# Altium PCB smart_bms.PcbDoc
Units mm, origin at the board's own origin, x right, y up, seen from the top; angles counter-clockwise.
Board outline 50 x 50 mm, 2 copper layers (Top Layer, Bottom Layer); 164 components, 149 nets, 655 pads, 9 vias.
Unrouted connection lines stored in the file: 476.
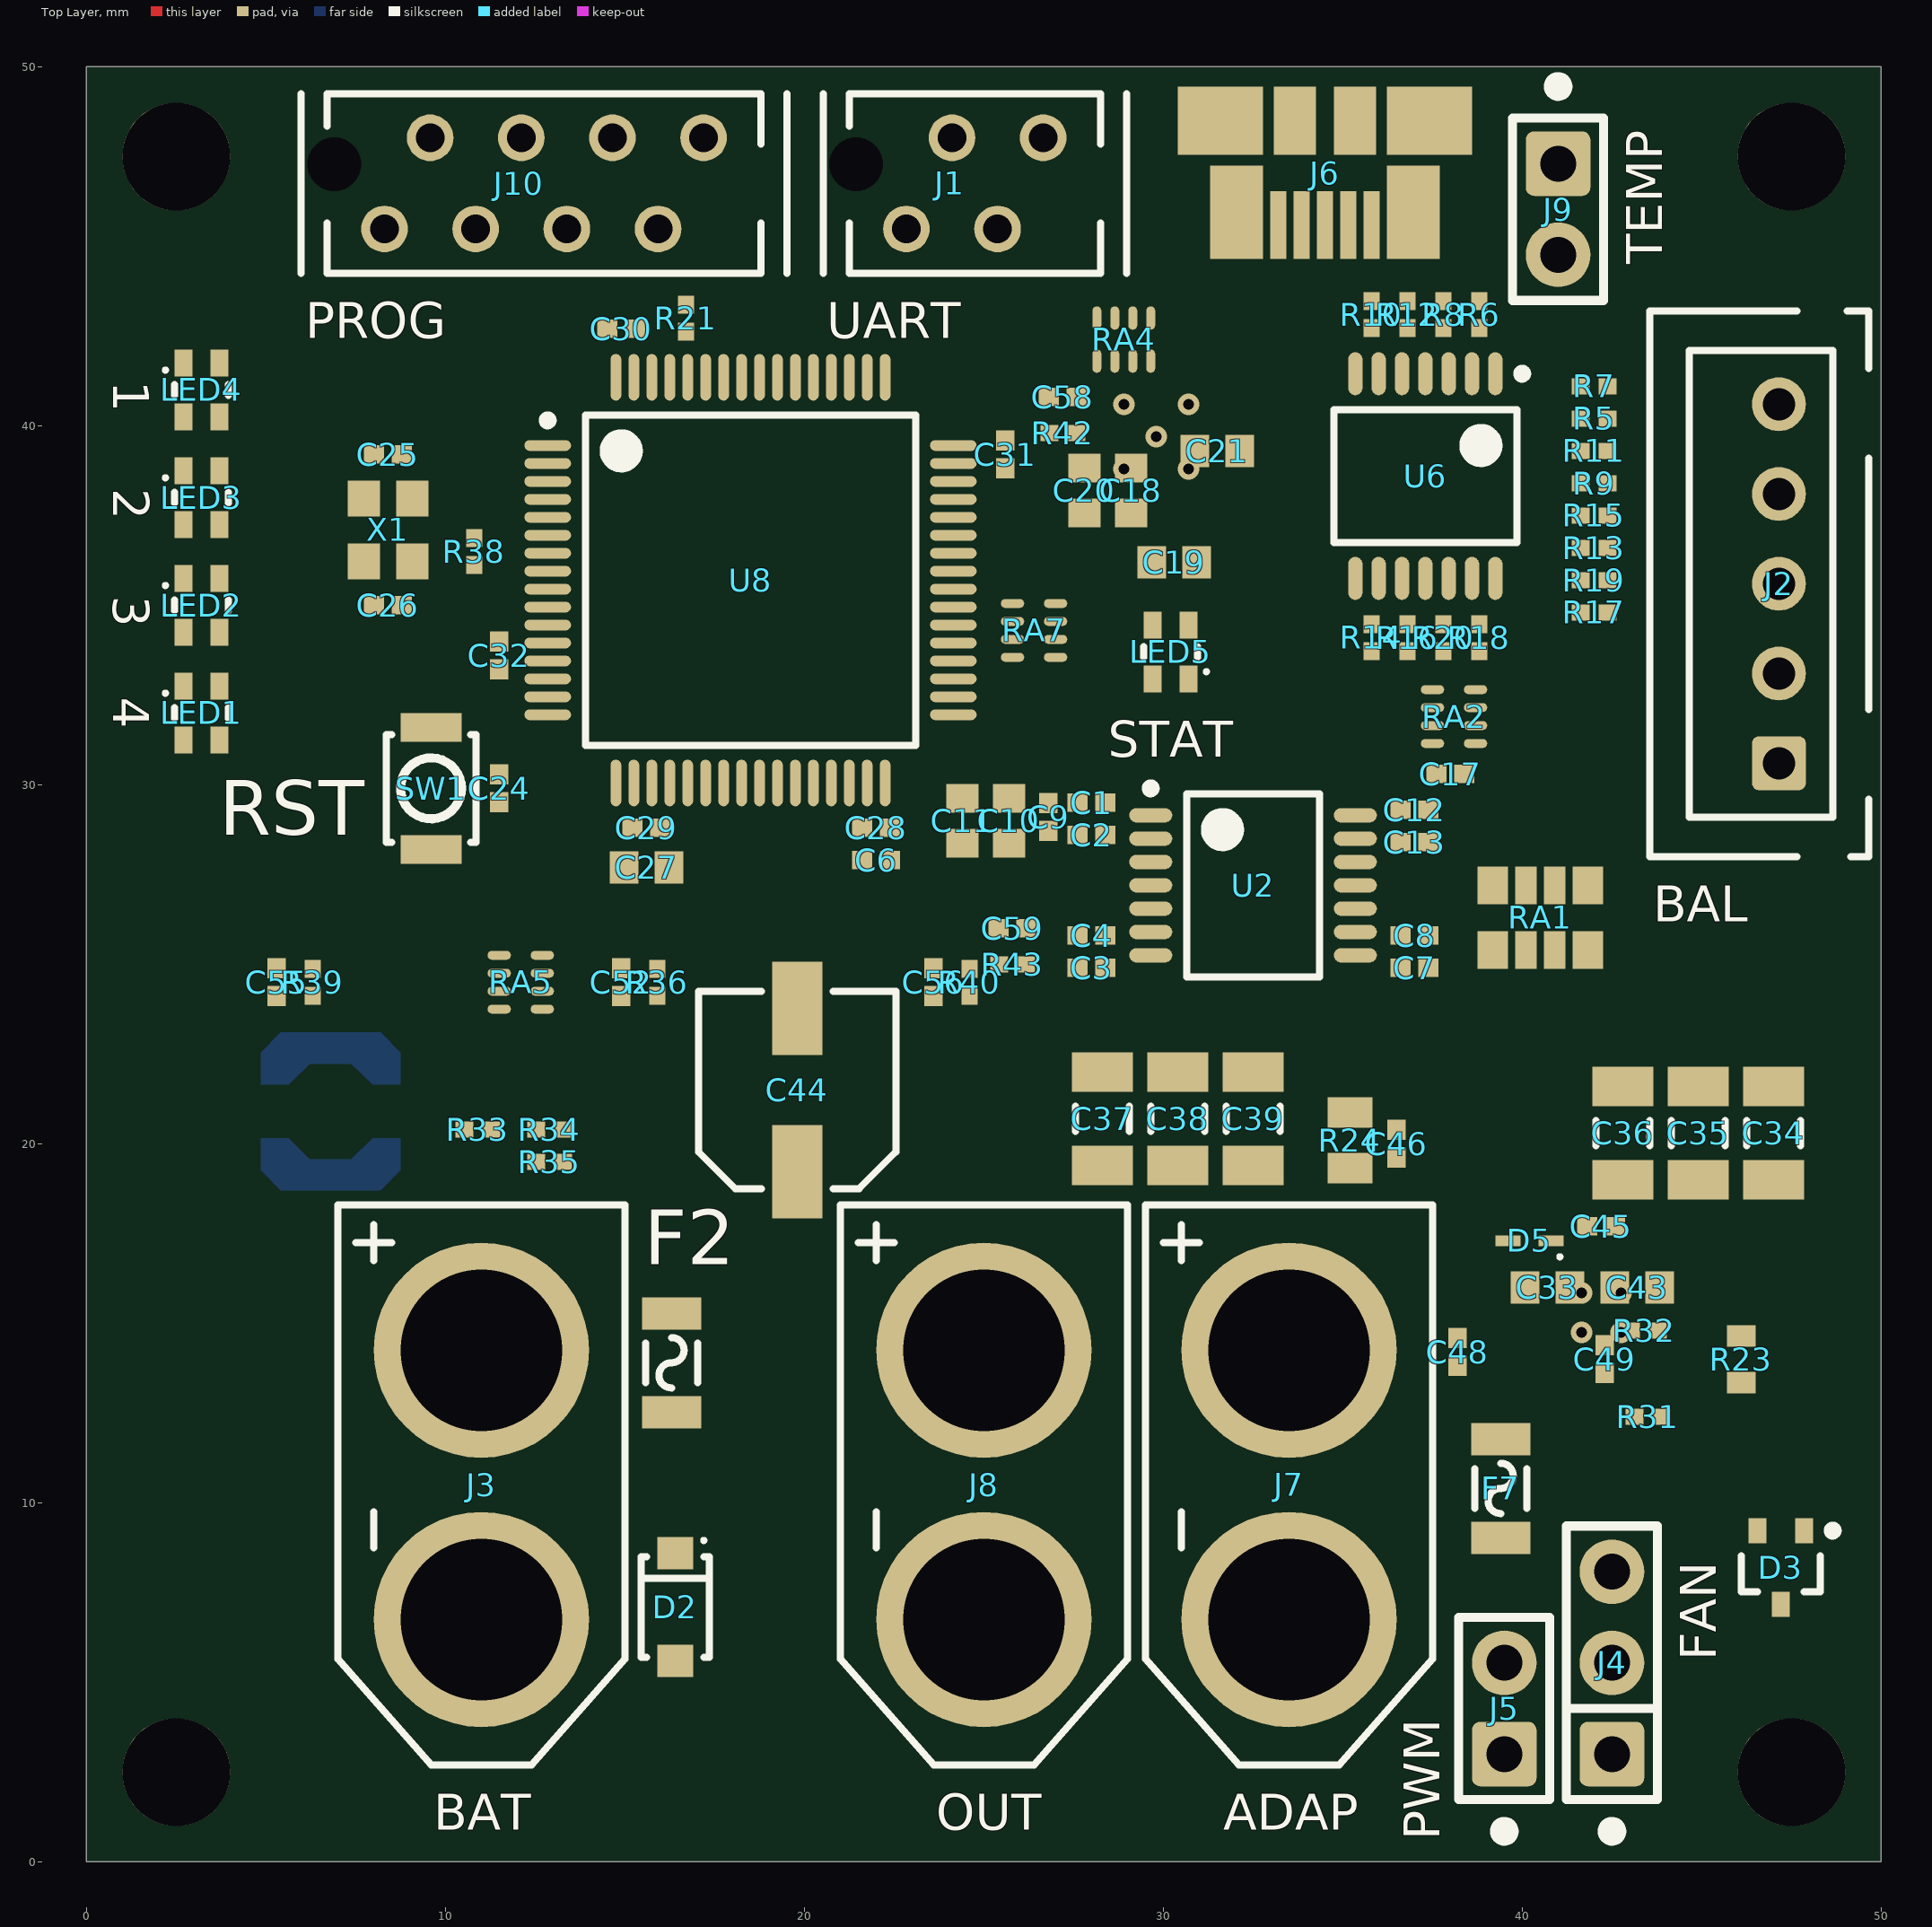
[diagram p0: Top Layer view]
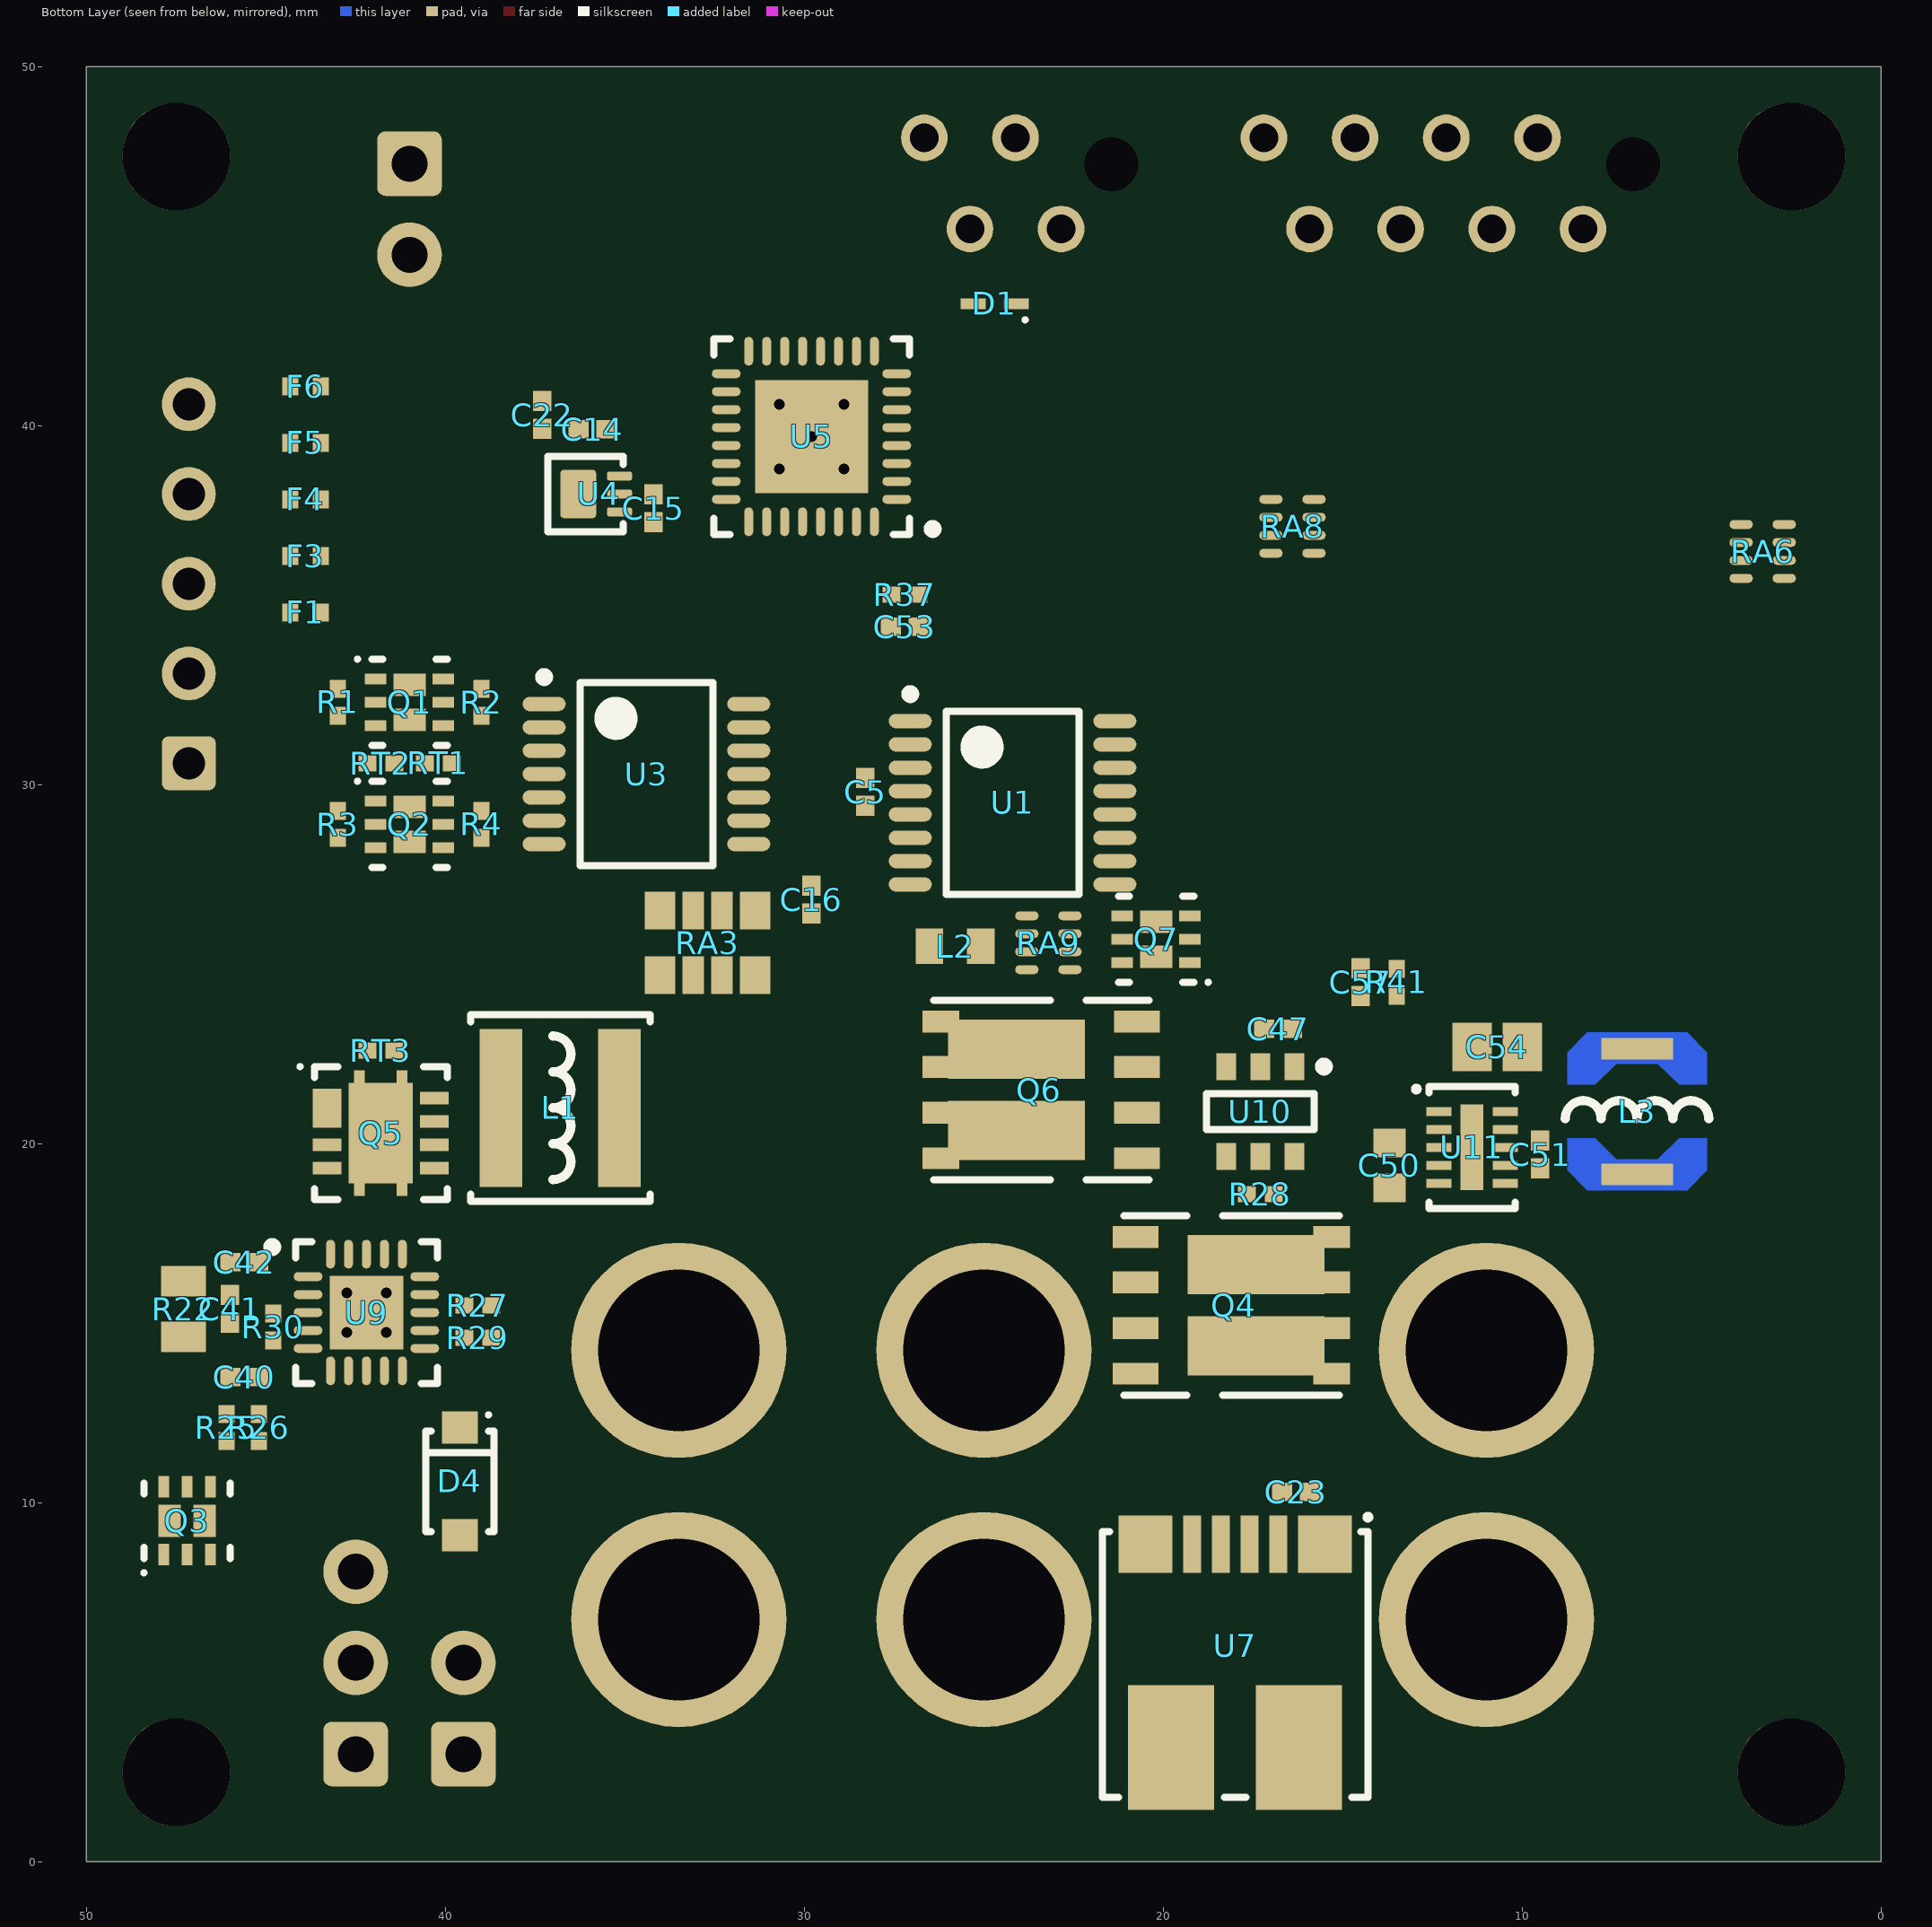
[diagram p1: Bottom Layer view, seen from below]

## Layer stack, top to bottom
Top Solder: solder mask 0.0102, Solder Resist, Dk 3.5
Top Layer: signal copper 0.0356
Dielectric 1: dielectric 0.32, FR-4, Dk 4.8
Bottom Layer: signal copper 0.0356
Bottom Solder: solder mask 0.0102, Solder Resist, Dk 3.5

## Board outline
0,0 50,0 50,50 0,50

## Design rules (kind name [scope] priority, off if disabled: settings)
Clearance [All] p1: gap=0.15 ignorepadtopadclearanceinfootprint=FALSE
DiffPairsRouting [All] p1: maxlimit=0.3 minlimit=0.15 mostfreqgap=0.2 toplayer_minwidth=0.15 toplayer_maxwidth=0.4 toplayer_prefwidth=0.2 bottomlayer_minwidth=0.15 bottomlayer_maxwidth=0.4 bottomlayer_prefwidth=0.2 maxuncoupledlength=12.7
HoleSize [All] p1: absolutevalues=TRUE maxlimit=6.3 minlimit=0.3 maxpercent=80.000 minpercent=20.000
MinimumAnnularRing [All] p1: minimumring=0.15
PlaneClearance [All] p1: clearance=0.25
PlaneConnect [All] p1: planeconnectstyle=Relief reliefexpansion=0.4 reliefentries=4 reliefconductorwidth=0.25 reliefairgap=0.15
PolygonConnect [All] p1: connectstyle=Relief reliefconductorwidth=0.254 reliefentries=4 polygonreliefangle="90 Angle" airgapwidth=0.254
RoutingVias [All] p1: holewidth=0.3 width=0.6 viastyle="Through Hole" minholewidth=0.3 minwidth=0.6 maxholewidth=1 maxwidth=2
SolderMaskExpansion [All] p1: expansion=0.102
UnRoutedNet [All] p1: checkbadconnections=TRUE
Width [All] p1: maxlimit=5 minlimit=0.15 preferedwidth=0.2 minimp=50.000000 maximp=50.000000 favimp=50.000000
25 further rules are at their usual default settings.

## Classes and differential pairs
net class DIFF_USB: COM.USB_D_N COM.USB_D_P
component class power: C33 C34 C35 C36 C37 C38 C39 C40 C41 C42 C43 C44 C45 C46 C47 C48 C49 C50 C51 C52 C53 C54 C55 C56 C57 C58 C59 D5 L1 L2 L3 Q4 Q5 Q6 Q7 R22 R23 R24 R25 R26 R27 R28 R29 R30 R31 R32 R33 R34 R35 R36 R37 R39 R40 R41 R42 R43 RA8 RA9 RT3 U9 U10 U11
component class MCU: C24 C25 C26 C27 C28 C29 C30 C31 C32 LED1 LED2 LED3 LED4 LED5 R21 R38 RA6 RA7 SW1 U8 X1
component class connectors: C23 D1 D2 D3 D4 F1 F2 F3 F4 F5 F6 F7 J1 J2 J3 J4 J5 J6 J7 J8 J9 J10 Q3 RA5 U7
component class batteryMeasurement: C18 C19 C20 C21 C22 R5 R6 R7 R8 R9 R10 R11 R12 R13 R14 R15 R16 R17 R18 R19 R20 U5 U6
component class balancer: C1 C2 C3 C4 C5 C6 C7 C8 C9 C10 C11 C12 C13 C14 C15 C16 C17 Q1 Q2 R1 R2 R3 R4 RA1 RA2 RA3 RA4 RT1 RT2 U1 U2 U3 U4
differential pair COM.USB_D: +COM.USB_D_P -COM.USB_D_N

## Components (designator, comment, footprint, x,y, rotation, side; value= is the part's Value field where it differs from the comment)
C1 "25V" CAP0402 28,29.5 r0 top
C2 "25V" CAP0402 28,28.6 r0 top
C3 "25V" CAP0402 28,24.9 r0 top
C4 "25V" CAP0402 28,25.8 r0 top
C5 "100nF" CAP0402 28.3,29.8 r90 bottom
C6 "100nF" CAP0402 22,27.9 r0 top
C7 "25V" CAP0402 37,24.9 r180 top
C8 "25V" CAP0402 37,25.8 r180 top
C9 "100nF" CAP0402 26.8,29.1 r90 top
C10 "1uF" CAP0603 25.7,29 r90 top
C11 "10uF" CAP0603 24.4,29 r90 top
C12 "25V" CAP0402 37,29.3 r180 top
C13 "25V" CAP0402 37,28.4 r180 top
C14 "100nF" CAP0402 35.9,39.9 r0 bottom
C15 "100nF" CAP0402 34.2,37.7 r270 bottom
C16 "100nF" CAP0402 29.8,26.8 r270 bottom
C17 "100nF" CAP0402 38,30.3 r0 top
C18 "10uF" CAP0603 29.1,38.2 r270 top
C19 "1uF" CAP0603 30.3,36.2 r180 top
C20 "1uF" CAP0603 27.8,38.2 r270 top
C21 "1uF" CAP0603 31.5,39.3 r0 top
C22 "100nF" CAP0402 37.3,40.3 r270 bottom
C23 "0nF" CAP0402 16.3,10.3 r0 bottom
C24 "25V" CAP0402 11.5,29.9 r90 top
C25 "25V" CAP0402 8.4,39.2 r180 top
C26 "25V" CAP0402 8.4,35 r0 top
C27 "6.3V" CAP0603 15.6,27.7 r0 top
C28 "25V" CAP0402 22,28.8 r180 top
C29 "25V" CAP0402 15.6,28.8 r180 top
C30 "25V" CAP0402 14.9,42.7 r0 top
C31 "25V" CAP0402 25.6,39.2 r270 top
C32 "25V" CAP0402 11.5,33.6 r90 top
C33 "25V" CAP0603 40.7,16 r0 top
C34 "" CAP1206 47,20.3 r90 top
C35 "" CAP1206 44.9,20.3 r90 top
C36 "" CAP1206 42.8,20.3 r90 top
C37 "" CAP1206 28.3,20.7 r270 top
C38 "" CAP1206 30.4,20.7 r270 top
C39 "" CAP1206 32.5,20.7 r270 top
C40 "0nF" CAP0402 45.6,13.5 r0 bottom
C41 "0nF" CAP0402 46,15.4 r90 bottom
C42 "0nF" CAP0402 45.6,16.7 r180 bottom
C43 "1uF" CAP0603 43.2,16 r180 top
C44 "cap_pol" CAPAE6253X61L 19.8,21.5 r90 top
C45 "" CAP0402 42.2,17.7 r0 top
C46 "0nF" CAP0402 36.5,20 r270 top
C47 "0nF" CAP0402 16.8,23.2 r180 bottom
C48 "0nF" CAP0402 38.2,14.2 r90 top
C49 "25V" CAP0402 42.3,14 r270 top
C50 "25V" CAP0603 13.7,19.4 r90 bottom
C51 "25V" CAP0402 9.5,19.7 r90 bottom
C52 "25V" CAP0402 14.9,24.5 r90 top
C53 "25V" CAP0402 27.2,34.4 r0 bottom
C54 "" CAP0805 10.7,22.7 r0 bottom
C55 "25V" CAP0402 5.3,24.5 r90 top
C56 "25V" CAP0402 23.6,24.5 r90 top
C57 "25V" CAP0402 14.5,24.5 r90 bottom
C58 "25V" CAP0402 27.2,40.8 r0 top
C59 "25V" CAP0402 25.8,26 r0 top
D1 "BAT54XV2T1G" SOD523 24.7,43.4 r0 bottom
D2 "PTVS17VS1UR" SOD123W 16.4,7.1 r270 top
D3 "BAT54CWT1G" SOT65P210X110-3L 47.2,8.2 r270 top
D4 "PTVS22VS1UR" SOD123W 39.6,10.6 r270 bottom
D5 "BAT54XV2T1G" SOD523 40.2,17.3 r180 top
F1 "fuse" FUSE-0402 43.9,34.8 r0 bottom
F2 "fuse" FUSE-1206 16.3,13.9 r270 top
F3 "fuse" FUSE-0402 43.9,36.375 r0 bottom
F4 "fuse" FUSE-0402 43.9,37.95 r0 bottom
F5 "fuse" FUSE-0402 43.9,39.525 r0 bottom
F6 "fuse" FUSE-0402 43.9,41.1 r0 bottom
F7 "fuse" FUSE-1206 39.4,10.4 r270 top
J1 "UART" MICRO-MATCH-4 24.75,46.75 r180 top
J2 "BAL" JST-XH-5-TOP 47.15,30.6 r90 top
J3 "BAT" XT60_male 11,6.75 r90 top
J4 "FAN" "Pin Header 1x3 TH Pitch 2.54mm" 42.5,3 r90 top
J5 "PWM" "Pin Header 1x2 TH Pitch 2.54mm" 39.5,3 r90 top
J6 "USB-5PIN" USB-B-MICRO-473460001 34.5,48.5 r180 top
J7 "ADAP" XT60_male 33.5,6.75 r90 top
J8 "OUT" XT60_male 25,6.75 r90 top
J9 "TEMP" "Pin Header 1x2 TH Pitch 2.54mm" 41,47.3 r270 top
J10 "PROG" MICRO-MATCH-8 12.75,46.75 r180 top
L1 "XAL5030-222MEC" XAL5030-222MEC 36.8,21 r180 bottom
L2 "chip_inductor" INDC0603 25.8,25.5 r0 bottom
L3 "LPS4018-333MR" LPS4018 6.8,20.9 r90 bottom
LED1 "4" LED-RGB-1615-CA-OSTB0603C1C-A 3.2,32 r90 top
LED2 "3" LED-RGB-1615-CA-OSTB0603C1C-A 3.2,35 r90 top
LED3 "2" LED-RGB-1615-CA-OSTB0603C1C-A 3.2,38 r90 top
LED4 "1" LED-RGB-1615-CA-OSTB0603C1C-A 3.2,41 r90 top
LED5 "STAT" LED-RGB-1615-CA-OSTB0603C1C-A 30.2,33.7 r270 top
Q1 "CSD87502Q2T" SON65P200X80_HS-7L_DUALFET 41,32.3 r180 bottom
Q2 "CSD87502Q2T" SON65P200X80_HS-7L_DUALFET 41,28.9 r180 bottom
Q3 "CSD87502Q2T" SON65P200X80_HS-7L_DUALFET 47.2,9.5 r90 bottom
Q4 "SI7997DP-T1-GE3" "PowerPAK SO-8 DUAL" 18.1,15.5 r180 bottom
Q5 "CSD87330Q3D" TI_Q3D 41.8,20.3 r180 bottom
Q6 "Si7997DP" "PowerPAK SO-8 DUAL" 23.4,21.5 r0 bottom
Q7 "CSD87502Q2" SON65P200X80_HS-7L_DUALFET 20.2,25.7 r0 bottom
R1 "100mR" RES0402 43,32.3 r90 bottom
R2 "100mR" RES0402 39,32.3 r270 bottom
R3 "100mR" RES0402 43,28.9 r270 bottom
R4 "100mR" RES0402 39,28.9 r90 bottom
R5 "100K" RES0402 42,40.2 r0 top
R6 "68K" RES0402 38.8,43.1 r270 top
R7 "100K" RES0402 42,41.1 r0 top
R8 "68K" RES0402 37.8,43.1 r270 top
R9 "100K" RES0402 42,38.4 r0 top
R10 "68K" RES0402 35.8,43.1 r270 top
R11 "100K" RES0402 42,39.3 r0 top
R12 "68K" RES0402 36.8,43.1 r270 top
R13 "100K" RES0402 42,36.6 r0 top
R14 "68K" RES0402 35.8,34.1 r90 top
R15 "100K" RES0402 42,37.5 r0 top
R16 "68K" RES0402 36.8,34.1 r90 top
R17 "100K" RES0402 42,34.8 r0 top
R18 "68K" RES0402 38.8,34.1 r90 top
R19 "100K" RES0402 42,35.7 r0 top
R20 "68K" RES0402 37.8,34.1 r90 top
R21 "resistor" RES0402 16.7,43 r90 top
R22 "0R" RES0805 47.3,15.4 r90 bottom
R23 "0R" RES0603 46.1,14 r90 top
R24 "0R" RES0805 35.2,20.1 r270 top
R25 "resistor" RES0402 46.1,12.1 r90 bottom
R26 "0R" RES0402 45.2,12.1 r270 bottom
R27 "resistor" RES0402 39.1,15.5 r180 bottom
R28 "resistor" RES0402 17.3,18.6 r0 bottom
R29 "resistor" RES0402 39.1,14.6 r180 bottom
R30 "resistor" RES0402 44.8,14.9 r270 bottom
R31 "resistor" RES0402 43.5,12.4 r0 top
R32 "resistor" RES0402 43.4,14.8 r0 top
R33 "resistor" RES0402 10.9,20.4 r0 top
R34 "resistor" RES0402 12.9,20.4 r0 top
R35 "resistor" RES0402 12.9,19.5 r180 top
R36 "resistor" RES0402 15.9,24.5 r270 top
R37 "resistor" RES0402 27.2,35.3 r180 bottom
R38 "resistor" RES0402 10.8,36.5 r90 top
R39 "resistor" RES0402 6.3,24.5 r90 top
R40 "resistor" RES0402 24.6,24.5 r90 top
R41 "resistor" RES0402 13.5,24.5 r90 bottom
R42 "resistor" RES0402 27.2,39.8 r0 top
R43 "resistor" RES0402 25.8,25 r0 top
RA1 "100K" CAC-80P319X159-8M 40.5,26.3 r270 top
RA2 "100R" CAC-50P200X100-8L 38.1,31.9 r0 top
RA3 "22K" CAC-80P319X159-8M 32.7,25.6 r270 bottom
RA4 "quad_resistor" CAC-50P200X100-8L 28.9,42.4 r90 top
RA5 "quad_resistor" CAC-50P200X100-8L 12.1,24.5 r0 top
RA6 "quad_resistor" CAC-50P200X100-8L 3.3,36.5 r0 bottom
RA7 "quad_resistor" CAC-50P200X100-8L 26.4,34.3 r180 top
RA8 "10k" CAC-50P200X100-8L 16.4,37.2 r0 bottom
RA9 "quad_resistor" CAC-50P200X100-8L 23.2,25.6 r180 bottom
RT1 "-t°, 10K" RES0402 40.2,30.6 r180 bottom
RT2 "-t°, 10K" RES0402 41.8,30.6 r180 bottom
RT3 "thermistor" RES0402 41.8,22.6 r0 bottom
SW1 "RST" B3U-1000P 9.6,29.9 r90 top
U1 "DAC8555" TSOP65P640X120-16L 24.2,29.5 r180 bottom
U2 "NCV2902DTBR2G" TSOP65P640X120-14L 32.5,27.2 r0 top
U3 "MAX4378TAUD+" TSOP65P640X120-14L 34.4,30.3 r180 bottom
U4 "LT6660" DFN50P200X200X75_4L_EP 36.1,38.1 r90 bottom
U5 "ADS7953SBRHBT" QFN50P500X500X100_HS-33L 29.8,39.7 r0 bottom
U6 "NCV2902DTBR2G" TSOP65P640X120-14L 37.3,38.6 r270 top
U7 "TLI4970D050" PG-TISON-8-1 18,5.5 r270 bottom
U8 "STM32L073RZT6" STM-LQFP64_N 18.5,35.7 r0 top
U9 "bq24707" QFN50P350X350X100_HS-21L 42.2,15.3 r180 bottom
U10 "LTC4412" SOT95P280X100-6L 17.3,20.9 r270 bottom
U11 "LT3970" DFN50P200X300X85_HS-11L 11.4,19.9 r180 bottom
X1 "ABM10" XTAL-2.5x2.0 8.4,37.1 r270 top

## Footprints (in the part's own frame and the unit in brackets; to place one, negate y for a bottom-side part, rotate by r counter-clockwise, add the part's x,y. Pads: shape width x height; smd on the part's side, far side on the other; paste and mask are expansions set on the pad)
B3U-1000P [mm]
  rect 0.8x1.7 smd: 1(-1.7,0) 2(1.7,0)
  silkscreen extent -1.5,-1.25 1.5,1.25, body extent -2,-1.25 2,1.25, height 1.6
CAC-50P200X100-8L [mm] "Chip Array, ConvexE, 8-Leads, Pitch 0,50mm,  Body 2,00x1,00mm,  IPC High Density"
  oval 0.65x0.25 smd: 1(-0.6,0.75) 2(-0.6,0.25) 3(-0.6,-0.25) 4(-0.6,-0.75) 5(0.6,-0.75) 6(0.6,-0.25) 7(0.6,0.25) 8(0.6,0.75)
  body extent -0.6,-1.05 0.6,1.05, height 0.55
CAC-80P319X159-8M [mm] "Chip Array, ConvexS, 8-Leads, Pitch 0,80mm,  Body 3,20x1,60mm,  IPC Low Density"
  rect 1.05x0.85 smd: 1(-0.9,1.325) 4(-0.9,-1.325) 5(0.9,-1.325) 8(0.9,1.325)
  rect 1.05x0.6 smd: 2(-0.9,0.4) 3(-0.9,-0.4) 6(0.9,-0.4) 7(0.9,0.4)
  body extent -0.92,-1.68 0.92,1.68, height 0.7
CAP0402 [mm] "Chip Capacitor, 2-Leads, Body 1,00x0,50mm, IPC High Density"
  rect 0.56x0.52 smd: 1(-0.39,0) 2(0.39,0)
  body extent -0.53,-0.28 0.53,0.28, height 0.55
CAP0603 [mm] "Chip Capacitor, 2-Leads, Body 1,60x0,81mm, IPC High Density"
  rect 0.8x0.9 smd: 1(-0.625,0) 2(0.625,0)
  body extent -0.87,-0.5 0.87,0.5, height 0.86
CAP0805 [mm] "Chip Capacitor, 2-Leads, Body 2,00x1,25mm, IPC High Density"
  rect 1.1x1.35 smd: 1(-0.7,0) 2(0.7,0)
  body extent -1.1,-0.72 1.1,0.72, height 1.4
CAP1206 [mm] "Chip Capacitor, 2-Leads, Body 3,20x1,60mm, IPC High Density"
  rect 1.1x1.7 smd: 1(-1.3,0) 2(1.3,0)
  silkscreen extent -0.35,-0.75 0.35,0.75, body extent -1.7,-0.9 1.7,0.9, height 1.78
CAPAE6253X61L [mm] "Aluminum Electrolytic Capacitor, Body 5,30x5,30x6,10mm, IPC High Density"
  rect 2.6x1.4 smd: +(-2.275,0) -(2.275,0)
  silkscreen extent -2.75,-2.75 2.75,2.75, body extent -3.13,-2.75 3.13,2.75, height 6.1
DFN50P200X200X75_4L_EP [mm] "3-Lead Plastic DFN (2mm × 2mm)  (Reference LTC DWG # 05-08-1717 Rev ¨)"
  rrect50% 0.25x0.7 smd: 1(-0.5,-0.95) 2(0,-0.95) 3(0.5,-0.95)
  rrect20% 1.35x1 smd: 4(0,0.2)
  silkscreen extent -1.05,-1.05 1.05,1.05, body extent -1,-1 1,1, height 0.8
DFN50P200X300X85_HS-11L [mm] "DFN, 10-Leads, Body 2,00x3,00mm, Pitch 0,50mm, Thermal Pad 0,64x2,39mm"
  rect 0.7x0.25 smd: 1(-0.925,1) 2(-0.925,0.5) 3(-0.925,0) 4(-0.925,-0.5) 5(-0.925,-1) 6(0.925,-1) 7(0.925,-0.5) 8(0.925,0) 9(0.925,0.5) 10(0.925,1)
  rect 0.64x2.39 smd: 11(0,0)
  silkscreen extent -1.63,-1.7 1.2,1.7, body extent -1.06,-1.55 1.06,1.55, height 0.85
FUSE-0402 [mm] "Fuse, 2-Leads, Body 1,00x0,52mm, IPC High Density"
  rect 0.45x0.5 smd: 1(-0.425,0) 2(0.425,0)
  body extent -0.55,-0.3 0.55,0.3, height 0.49
FUSE-1206 [mm] "Fuse, 2-Leads, Body 3,20x1,60mm, IPC High Density"
  rect 0.9x1.65 smd: 1(-1.375,0) 2(1.375,0)
  silkscreen extent -0.7,-0.72 0.7,0.72, body extent -1.68,-0.87 1.68,0.87, height 0.6
INDC0603 [mm] "Chip Inductor, 2-Leads, Body 1,60x0,80mm, IPC Medium Density"
  rect 0.77x0.98 smd: 1(-0.715,0) 2(0.715,0)
  body extent -0.87,-0.47 0.88,0.48, height 0.95
JST-XH-5-TOP [mm]
  rrect25% 1.5x1.5 hole 0.9: 1(0,0)
  round 1.5 hole 0.9: 2(2.5,0) 3(5,0) 4(7.5,0) 5(10,0)
  silkscreen extent -2.6,-2.5 12.6,3.6, body extent -2.45,-2.35 12.45,3.4, height 7
LED-RGB-1615-CA-OSTB0603C1C-A [mm] "1.6X1.5mm FULL-COLOR SURFACE MOUNT LED"
  rect 0.75x0.5 smd: 1(0.75,0.5) 2(0.75,-0.5) 3(-0.75,0.5) 4(-0.75,-0.5)
  silkscreen extent -0.15,-0.75 0.6,1.05, body extent -0.8,-0.75 0.8,0.75, height 0.5
LPS4018 [mm] "Shielded wound inductor, 2-Leads, Body 3,90x3,90mm, Pitch 3,28mm, Pads 1,45x3,89mm"
  rect 0.6x2 smd: 1(-1.75,0) 2(1.75,0)
  Top Layer region: -0.75,1.945 -1.64,1.945 -2.2,1.395 -2.2,-1.395 -1.64,-1.945 -0.75,-1.945 -0.75,-1.17 -1.33,-0.575 -1.33,0.575 -0.75,1.17
  Top Layer region: 0.75,-1.945 1.64,-1.945 2.2,-1.395 2.2,1.395 1.64,1.945 0.75,1.945 0.75,1.17 1.33,0.575 1.33,-0.575 0.75,-1.17
  silkscreen extent -0.2,-2 0.3,2, body extent -2.05,-2.05 2.05,2.05, height 1.8
MICRO-MATCH-4 [mm]
  round 1.3 hole 0.8: 1(1.905,1.27) 2(0.635,-1.27) 3(-0.635,1.27) 4(-1.905,-1.27)
  round 0 hole 1.5 unplated: drill(3.305,-0.53)
  silkscreen extent -4.23,-2.5 4.23,2.5, body extent -3.5,-2.5 3.51,2.5, height 4
MICRO-MATCH-8 [mm]
  round 1.3 hole 0.8: 1(4.445,1.27) 2(3.175,-1.27) 3(1.905,1.27) 4(0.635,-1.27) 5(-0.635,1.27) 6(-1.905,-1.27) 7(-3.175,1.27) 8(-4.445,-1.27)
  round 0 hole 1.5 unplated: drill(5.845,-0.53)
  silkscreen extent -6.77,-2.5 6.77,2.5, body extent -6.04,-2.5 6.05,2.5, height 4
PG-TISON-8-1 [mm] "SON, 8-Leads, Body 7,00x7,00mm, Pitch 0,80mm, IPC High Density"
  rect 1.6x1.5 smd: 1(-3.35,2.5) 6(-3.35,-2.5)
  rect 1.6x0.5 smd: 2(-3.35,1.2) 3(-3.35,0.4) 4(-3.35,-0.4) 5(-3.35,-1.2)
  rect 3.48x2.4 smd: 7(2.32,-1.78) 8(2.32,1.78)
  silkscreen extent -4.15,-3.7 3.7,3.75, body extent -3.55,-3.55 3.55,3.55, height 1.05
"Pin Header 1x2 TH Pitch 2.54mm" [mm] "PinHeader 1x2 TH Pitch 2.54mm"
  rrect25% 1.8x1.8 hole 1: 1(0,0)
  round 1.8 hole 1: 2(2.54,0)
  silkscreen extent -2.3,-1.27 3.81,1.27, body extent -1.27,-1.27 3.81,1.27, height 9.5
"Pin Header 1x3 TH Pitch 2.54mm" [mm] "PinHeader 1x3 TH Pitch 2.54mm"
  rrect25% 1.8x1.8 hole 1: 1(0,0)
  round 1.8 hole 1: 2(2.54,0) 3(5.08,0)
  silkscreen extent -2.3,-1.27 6.35,1.27, body extent -1.27,-1.27 6.35,1.27, height 9.5
"PowerPAK SO-8 DUAL" [mm] "PPAK, 8-Leads, Body 5,00x6,00mm, Pitch 1,27mm, Dual Thermal Pad 3,66x1,50mm"
  rect 3.81x1.65 smd: D1(0.69,1.13) D2(0.69,-1.13)
  rect 1.02x0.61 smd: D1(2.795,0.635) D1(2.795,1.905) D2(2.795,-1.905) D2(2.795,-0.635)
  rect 1.27x0.61 smd: G1(-2.67,0.635) G2(-2.67,-1.905) S1(-2.67,1.905) S2(-2.67,-0.635)
  silkscreen extent -3,-2.5 3,2.5, body extent -3.07,-2.57 3.08,2.58, height 1.09
QFN50P350X350X100_HS-21L [mm] "QFN, 20-Leads, Body 3,50x3,50mm, Pitch 0,50mm, Thermal Pad 2,05x2,05mm, IPC High Density"
  oval 0.8x0.25 smd: 1(-1.625,1) 2(-1.625,0.5) 3(-1.625,0) 4(-1.625,-0.5) 5(-1.625,-1) 11(1.625,-1) 12(1.625,-0.5) 13(1.625,0) 14(1.625,0.5) 15(1.625,1)
  oval 0.25x0.8 smd: 6(-1,-1.625) 7(-0.5,-1.625) 8(0,-1.625) 9(0.5,-1.625) 10(1,-1.625) 16(1,1.625) 17(0.5,1.625) 18(0,1.625) 19(-0.5,1.625) 20(-1,1.625)
  rect 2.05x2.05 smd: 21(0,0)
  silkscreen extent -2.75,-1.97 1.97,1.97, body extent -1.9,-1.91 1.91,1.9, height 1
QFN50P500X500X100_HS-33L [mm] "QFN, 32-Leads, Body 5,00x5,00mm, Pitch 0,50mm, Thermal Pad 3,15x3,15mm, IPC High Density"
  oval 0.8x0.25 smd: 1(-2.375,1.75) 2(-2.375,1.25) 3(-2.375,0.75) 4(-2.375,0.25) 5(-2.375,-0.25) 6(-2.375,-0.75) 7(-2.375,-1.25) 8(-2.375,-1.75) 17(2.375,-1.75) 18(2.375,-1.25) 19(2.375,-0.75) 20(2.375,-0.25) 21(2.375,0.25) 22(2.375,0.75) 23(2.375,1.25) 24(2.375,1.75)
  oval 0.25x0.8 smd: 9(-1.75,-2.375) 10(-1.25,-2.375) 11(-0.75,-2.375) 12(-0.25,-2.375) 13(0.25,-2.375) 14(0.75,-2.375) 15(1.25,-2.375) 16(1.75,-2.375) 25(1.75,2.375) 26(1.25,2.375) 27(0.75,2.375) 28(0.25,2.375) 29(-0.25,2.375) 30(-0.75,2.375) 31(-1.25,2.375) 32(-1.75,2.375)
  rect 3.15x3.15 smd: 33(0,0)
  silkscreen extent -3.5,-2.73 2.73,2.72, body extent -2.65,-2.66 2.66,2.66, height 1
RES0402 [mm] "Chip Resistor, 2-Leads, Body 1,00x0,50mm, IPC High Density"
  rect 0.5x0.45 smd: 1(-0.375,0) 2(0.375,0)
  body extent -0.52,-0.28 0.53,0.27, height 0.42
RES0603 [mm] "Chip Resistor, 2-Leads, Body 1,60x0,80mm, IPC High Density"
  rect 0.6x0.8 smd: 1(-0.65,0) 2(0.65,0)
  body extent -0.85,-0.45 0.85,0.45, height 0.4
RES0805 [mm] "Chip Resistor, 2-Leads, Body 2,00x1,25mm, IPC High Density"
  rect 0.85x1.25 smd: 1(-0.775,0) 2(0.775,0)
  body extent -1.05,-0.68 1.05,0.68, height 0.8
SOD123W [mm] "SODFL, 2-Leads, Body 1,70x3,50mm, IPC High Density"
  rect 0.9x1 smd: A(1.5,0) C(-1.5,0)
  silkscreen extent -1.9,-0.95 1.4,0.95, body extent -1.75,-0.95 1.75,0.95, height 1.1
SOD523 [mm] "SODFL, 2-Leads, Body 0,80x1,60mm, IPC High Density"
  rect 0.7x0.3 smd: A(0.6,0) C(-0.6,0)
  silkscreen extent -0.9,0.4 -0.8,0.5, body extent -0.8,-0.43 0.8,0.42, height 0.65
SON65P200X80_HS-7L_DUALFET [mm] "SON, 6-Leads, Body 2,00x2,00mm, Pitch 0,65mm, Dual Thermal Pad 0,625x0,9mm, IPC High Density"
  rect 0.9x0.625 smd: D1(0,0.488) D2(0,-0.488)
  rect 0.6x0.3 smd: D1(0.945,0.65) D2(-0.945,-0.65) G1(-0.945,0) G2(0.945,0) S1(-0.945,0.65) S2(0.945,-0.65)
  silkscreen extent -1.5,-1.2 1.05,1.25, body extent -1.1,-1.05 1.1,1.05, height 0.8
SOT65P210X110-3L [mm] "SOT23, 3-Leads, Body 2,00x2,10mm, Pitch 0,65mm, IPC High Density"
  rect 0.7x0.5 smd: 1(-1.025,0.65) 2(-1.025,-0.65) 3(1.025,0)
  silkscreen extent -1.15,-1.1 0.67,1.58, body extent -1.3,-1.1 1.3,1.1, height 1.1
SOT95P280X100-6L [mm] "SOT23, 6-Leads, Body 2,90x2,80mm, Pitch 0,95mm, IPC High Density"
  rect 0.75x0.55 smd: 1(-1.25,0.95) 2(-1.25,0) 3(-1.25,-0.95) 4(1.25,-0.95) 5(1.25,0) 6(1.25,0.95)
  silkscreen extent -1.37,-1.5 0.5,1.9, body extent -1.45,-1.5 1.45,1.5, height 1
STM-LQFP64_N [mm] "QFP, 64-Leads, Body 10x10mm, Pitch 0.5mm, IPC Medium Density"
  oval 1.3x0.3 smd: 1(-5.65,3.75) 2(-5.65,3.25) 3(-5.65,2.75) 4(-5.65,2.25) 5(-5.65,1.75) 6(-5.65,1.25) 7(-5.65,0.75) 8(-5.65,0.25) 9(-5.65,-0.25) 10(-5.65,-0.75) 11(-5.65,-1.25) 12(-5.65,-1.75) 13(-5.65,-2.25) 14(-5.65,-2.75) 15(-5.65,-3.25) 16(-5.65,-3.75) 33(5.65,-3.75) 34(5.65,-3.25) 35(5.65,-2.75) 36(5.65,-2.25) 37(5.65,-1.75) 38(5.65,-1.25) 39(5.65,-0.75) 40(5.65,-0.25) 41(5.65,0.25) 42(5.65,0.75) 43(5.65,1.25) 44(5.65,1.75) 45(5.65,2.25) 46(5.65,2.75) 47(5.65,3.25) 48(5.65,3.75)
  oval 0.3x1.3 smd: 17(-3.75,-5.65) 18(-3.25,-5.65) 19(-2.75,-5.65) 20(-2.25,-5.65) 21(-1.75,-5.65) 22(-1.25,-5.65) 23(-0.75,-5.65) 24(-0.25,-5.65) 25(0.25,-5.65) 26(0.75,-5.65) 27(1.25,-5.65) 28(1.75,-5.65) 29(2.25,-5.65) 30(2.75,-5.65) 31(3.25,-5.65) 32(3.75,-5.65) 49(3.75,5.65) 50(3.25,5.65) 51(2.75,5.65) 52(2.25,5.65) 53(1.75,5.65) 54(1.25,5.65) 55(0.75,5.65) 56(0.25,5.65) 57(-0.25,5.65) 58(-0.75,5.65) 59(-1.25,5.65) 60(-1.75,5.65) 61(-2.25,5.65) 62(-2.75,5.65) 63(-3.25,5.65) 64(-3.75,5.65)
  silkscreen extent -5.77,-4.6 4.6,4.6, body extent -5,-5 5,5, height 1.6
TI_Q3D [mm] "SON, 8-Leads, Body 3,30x3,30mm, Pitch 0,65mm, Thermal Pad 2,70x1,79mm, IPC High Density"
  rect 0.8x0.35 smd: Bg(1.495,-0.975) Tg(-1.495,-0.325) Tgr(-1.495,-0.975) Vsw(1.495,-0.325) Vsw(1.495,0.325) Vsw(1.495,0.975)
  rect 0.3x0.35 smd: Pgnd(-0.59,-1.575) Pgnd(-0.59,1.575) Pgnd(0.59,-1.575) Pgnd(0.59,1.575)
  rect 1.79x2.8 smd: Pgnd(0,0)
  rect 0.8x1.09 smd: Vin(-1.495,0.69)
  silkscreen extent -2.3,-1.85 1.85,1.9, body extent -1.7,-1.7 1.7,1.7, height 1.5
TSOP65P640X120-14L [mm] "TSOP, 14-Leads, Body 5,00x4,40mm, Pitch 0,65mm, IPC High Density"
  oval 1.2x0.4 smd: 1(-2.85,1.95) 2(-2.85,1.3) 3(-2.85,0.65) 4(-2.85,0) 5(-2.85,-0.65) 6(-2.85,-1.3) 7(-2.85,-1.95) 8(2.85,-1.95) 9(2.85,-1.3) 10(2.85,-0.65) 11(2.85,0) 12(2.85,0.65) 13(2.85,1.3) 14(2.85,1.95)
  silkscreen extent -2.97,-2.55 1.85,2.82, body extent -3.2,-2.55 3.2,2.55, height 1.2
TSOP65P640X120-16L [mm] "TSOP, 16-Leads, Body 5,00x4,40mm, Pitch 0,65mm, IPC High Density"
  oval 1.2x0.4 smd: 1(-2.85,2.275) 2(-2.85,1.625) 3(-2.85,0.975) 4(-2.85,0.325) 5(-2.85,-0.325) 6(-2.85,-0.975) 7(-2.85,-1.625) 8(-2.85,-2.275) 9(2.85,-2.275) 10(2.85,-1.625) 11(2.85,-0.975) 12(2.85,-0.325) 13(2.85,0.325) 14(2.85,0.975) 15(2.85,1.625) 16(2.85,2.275)
  silkscreen extent -2.98,-2.55 1.85,3.15, body extent -3.2,-2.55 3.2,2.55, height 1.2
USB-B-MICRO-473460001 [mm] "MOLEX 473460001"
  rect 0.45x1.88 smd: 1(-1.3,2.91) 2(-0.65,2.91) 3(0,2.91) 4(0.65,2.91) 5(1.3,2.91)
  rect 2.375x1.9 smd: SHLD(-2.913,0) SHLD(2.913,0)
  rect 1.475x2.6 smd: SHLD(-2.462,2.55) SHLD(2.462,2.55)
  rect 1.175x1.9 smd: SHLD(-0.837,0) SHLD(0.837,0)
  body extent -3.99,-2.15 3.99,3.28, height 2.72
XAL5030-222MEC [mm] "Shielded wound inductor, 2-Leads, Body 5,28x5,48mm, Pitch 3,31mm, Pads 1,18x4,40mm"
  rect 1.18x4.4 smd: 1(-1.65,0) 2(1.65,0)
  silkscreen extent -2.5,-2.6 2.5,2.6, body extent -2.64,-2.74 2.64,2.74, height 3.15
XT60_male [mm]
  round 6 hole 4.5: 1(0,0) 2(7.5,0)
  silkscreen extent -4.05,-4 11.55,4, body extent -4.05,-4 11.55,4, height 16.4
XTAL-2.5x2.0 [mm] "2.5mm x 2.0mm SMD Crystal Oscillator"
  rect 1x0.9 smd: 1(-0.875,-0.675) 2(0.875,-0.675) 3(0.875,0.675) 4(-0.875,0.675)
  body extent -1.25,-1 1.25,1, height 0.7

## Part data
C1 C2 C3 C4 C7 C8 C12 C13: library part capacitor, Capacitance=22nF, Dielectric=X5R, Tolerance=10%, Voltage=25V
C5 C6 C9 C10 C11 C14 C15 C16 C17 C18 C19 C20 C21 C22 C43: library part capacitor
C23 C40 C41 C42 C46 C47 C48: library part capacitor, Capacitance=100nF, Max voltage=25V, Tolerance=10%
C24 C28 C29 C30 C31 C32 C52 C53 C55 C56 C57 C58 C59: library part capacitor, Capacitance=100nF, Dielectric=X5R, Tolerance=10%, Voltage=25V
C25 C26: library part capacitor, Capacitance=8.2pF, Dielectric=X5R, Tolerance=10%, Voltage=25V
C27: library part capacitor, Capacitance=4.7uF, Dielectric=X5R, Tolerance=10%, Voltage=6.3V
C33: library part capacitor, Capacitance=1uF, Dielectric=X5R, Tolerance=10%, Voltage=25V
C34 C35 C36 C37 C38 C39: library part capacitor, Capacitance=10uF, Dielectric=X5R, Tolerance=10%, Voltage=25V
C44: Capacitance=68uF, Tolerance=20%, Voltage=25V, Type=AE
C45: library part capacitor, Capacitance=47nF, Dielectric=X5R, Tolerance=10%
C49: library part capacitor, Capacitance=100pF, Dielectric=X5R, Tolerance=10%, Voltage=25V
C50: library part capacitor, Capacitance=1uF, Dielectric=X7R, Tolerance=10%, Voltage=25V
C51: library part capacitor, Capacitance=220nF, Dielectric=X5R, Tolerance=10%, Voltage=25V
C54: library part capacitor, Capacitance=22uF, Dielectric=X5R, Tolerance=20%, Voltage=6.3V
D1 D5: library part "Schottky diode", Forward current=200mA, Max forward voltage=0.5V, Peak forward current=1A, Reverse voltage=30V
D2: library part TVS-DIODE, Clamping voltage=27.6, Peak pulse power dissipation=400W, Reverse stand-off voltage=17V
D3: library part DUAL-DIODE-CC, Forward current=200mA, Max forward voltage=0.5V, Peak forward current=600mA, Reverse voltage=30V
D4: library part TVS-DIODE, Clamping voltage=35.5V, Peak pulse power dissipation=400W, Reverse stand-off voltage=22V
F1 F3 F4 F5 F6: Breaking current=2A, Power=0.063W, Rated current=500mA, Rated voltage AC=12V, Rated voltage DC=24V, Blow characteristic="Slow blow"
F2: Breaking current=2A, Power=0.063W, Rated current=50A, Rated voltage AC=12V, Rated voltage DC=24V, Blow characteristic="Slow blow"
F7: Breaking current=2A, Power=0.063W, Rated current=10A, Rated voltage AC=12V, Rated voltage DC=24V, Blow characteristic="Slow blow"
J1: library part MICRO-MATCH-4
J2: library part HEADER-5
J3 J7 J8: library part XT60
J4: library part HEADER-3
J5 J9: library part HEADER-2
J10: library part MICRO-MATCH-8
L1: library part power_inductor, DC resistance max=14.5mR, Inductance=2.2uH, RMS current=9.7A, Saturation current=9.2A, Tolerance=20%
L2: DC current=250mA, DC resistance max=1.05ohm, Inductance=10uH, Self resonant frequency=17MHz, Tolerance=20%
L3: library part power_inductor, DC resistance max=200mR, Inductance=10uH, RMS current=900mA, Saturation current=1.2A, Tolerance=20%
LED1 LED2 LED3 LED4 LED5: library part RGB-LED-CA, Forward current=30mA, Vblue=2.8V, Vgreen=2.6V, Vred=2.0V
Q1 Q2: library part DUAL-MOSFET-N, PROD_ID=IC-08089
Q3 Q7: library part DUAL-NFET, PROD_ID=IC-08089
Q4 Q6: library part DUAL-PFET
Q5: library part BUCKFET
R1 R2 R3 R4 R5 R6 R7 R8 R9 R10 R11 R12 R13 R14 R15 R16 R17 R18 R19 R20: library part resistor
R21: Power=0.063W, Resistance=10k, Tolerance=1%
R22 R24: library part resistor, Power=0.5W, Resistance=10mR, Tolerance=1%
R23: library part resistor, Power=0.125W, Resistance=10R, Tolerance=5%
R25 R31: Power=0.063W, Resistance=430k, Tolerance=0.1%
R26: library part resistor, Power=0,63W, Resistance=68k, Tolerance=0.1%
R27: Power=0.063W, Resistance=10R, Tolerance=1%
R28: Power=0.063W, Resistance=470k, Tolerance=1%
R29: Power=0.063W, Resistance=7R5, Tolerance=1%
R30: Power=0.063W, Resistance=2M7, Tolerance=1%
R32: Power=0.063W, Resistance=22k6, Tolerance=0.1%
R33: Power=0.063W, Resistance=124k, Tolerance=1%
R34: Power=0.063W, Resistance=6M8, Tolerance=1%
R35: Power=0.063W, Resistance=750k, Tolerance=1%
R36 R37 R39 R40 R41 R42 R43: Power=0.063W, Resistance=0R, Tolerance=1%
R38: Power=0.063W, Resistance=1k, Tolerance=1%
RA1 RA2 RA3 RA8: library part quad_resistor
RA4 RA5 RA9: Resistance=10k
RA6 RA7: Resistance=1k
RT1 RT2: library part thermistor
  RT1: R0=10R
RT3: Max temp=125C, Min temp=-40C, Power=60mW, Resistance=10k, Tolerance=1%, Beta=3435K, Type=NTC
SW1: library part SPST_PUSHBUTTON, "Standard 2-contact pushbutton", Max current=50mA, Max voltage=24V
U1: "16-BIT, QUAD CHANNEL, ULTRA-LOW GLITCH, VOLTAGE OUTPUT  DIGITAL-TO-ANALOG CONVERTER"
U2 U6: library part QUAD_OPAMP
U3: library part MAX4378, "Quad, High-Side Current-Sense Amplifier with Internal Gain"
U4: "Tiny Micropower Precision Series References in 2mm × 2mm DFN"
U5: library part ADS7953RHB, "12-Bit, 1 MSPS, 16-Channel, Single-Ended, MicroPower, Serial Interface ADC"
U7: library part TLI4970, "High precision miniature coreless magnetic current sensor for AC and DC  measurements with digital interface and fast overcurrent detection", Measurement range=±50A
U8: library part CMP-1546-00073-1, "Ultra-Low-Power ARM Cortex-M0+ MCU, 192 KB Flash, 20 KB Internal RAM, 51 I/Os, 64-Pin LQFP, -40 to 85 degC, Tray", I/Os (High Current)=51, Operating Frequency(F) (Processor speed) (MHz)=32, Package Description="64-Pin Low-profile Quad Flat Package, Body 10 x 10 mm, Pitch 0.5 mm", Package Reference=LQFP64, Supply Voltage(Vcc) min (V)=1.8, ComponentLink1Description="Manufacturer URL", ComponentLink1URL=http://www.st.com/, ComponentLink2Description=Datasheet, ComponentLink2URL=http://www.st.com/st-web-ui/static/active/en/resource/technical/document/datasheet/DM00141036.pdf, Core="ARM Cortex-M0+", D/A Converter=2, Data E2PROM nom (B)=6144, DatasheetVersion="Rev. 2", FLASH Size (Prog) (kB)=192, Internal RAM Size (kB)=20, Mounting Technology="Surface Mount", Packing=Tray
U9: "1-4 Cell Li+ Battery SMBus Charge Controller With Independent Comparator and Advanced Circuit Protection"
U10: "Low Loss PowerPath™ Controller in ThinSOT"
U11: "40V, 350mA Step-Down Regulator with 2.5µA Quiescent Current and Integrated Diodes", Output voltage=3.3V
X1: library part XTAL-4pin, "4pin crystal with 2 GND pins", Frequency=16Mhz, Load capacitance=10pF, Shunt capacitance=7pF, Stability=20ppm

## Free pads (board coordinates)
  round 3 hole 3 unplated: 12(2.5,47.5) 13(47.5,47.5) 14(47.5,2.5) 15(2.5,2.5)

## Via types
v1: diameter 0.6, hole 0.3, Top Layer to Bottom Layer, 9 vias

## Nets (pads, with @x,y where several pads share a name; then routed paths per layer and width w, separated by ;. In a path a pad name is that pad's centre, name@x,y a point inside that pad or via, vN(x,y) a via of type N, cw(c..) or ccw(c..) an arc to the next point about the centre after c; other vN are vias at no path point)
+19V: C34.2 C35.2 C36.2 C41.2 C42.1 Q4.D2 Q5.Vin R22.2 U9.1
A\C\O\K\: RA8.2 U8.8 U9.5
ADC_SPI.MISO: U5.26 U7.3 U8.22
ADC_SPI.MOSI: U1.11 U5.25 U8.23
ADC_SPI.S\S\: U5.23 U8.40
ADC_SPI.SCK: U1.10 U5.24 U7.4 U8.21
AGND: C5.1 C14.2 C15.1 C16.2 C17.2 C18.1 C20.1 C21.1 C22.2 C32.2 C53.2 C58.2 C59.2 J9.2 R8.1 R12.1 R16.1 R20.1 R37.1 R42.2 R43.2 RA3.1 RA3.2 RA3.3 RA3.4 RT1.1 RT2.2 RT3.1 U1.5 U2.11 U3.11 U4.2 U4.4 U5.1 U5.4 U5.22 U5.30 U5.33 U6.11 U8.12
  other v1: 28.9,38.8 30.7,38.8 29.8,39.7 28.9,40.6 30.7,40.6
AVcc: C9.2 C10.2 C11.2 C20.2 C21.2 C32.1 L2.2 U1.4 U5.21 U5.32 U8.13
BAT_MINUS: D2.A J3.1 U7.8
BATGATE: Q4.G1 U10.5
C\S\_DAC: U1.9 U8.28
C\S\_TLI: U7.5 U8.26
Cell1-: F1.1 R4.2 R17.2 U3.6
Cell2-: F3.1 Q2.D2 R3.2 R13.2 R19.2 U3.9
Cell3-: F4.1 Q2.D1 R2.2 R9.2 R15.2 U3.2
Cell4+: F6.1 Q1.D1 R7.2
Cell4-: F5.1 Q1.D2 R1.1 R5.2 R11.2 U3.13
CMPOUT: R30.1 RA9.8 U8.20 U9.3
COM.STM_RX: J1.3 U8.43
COM.STM_TX: J1.4 U8.42
COM.USB_D_N: J6.2 U8.44
COM.USB_D_P: J6.3 U8.45
COM.USB_ID: J6.4 U8.41
CS1: U3.7 U5.18
CS2: U3.8 U5.19
CS3: U3.1 U5.17
CS4: U3.14 U5.20
DAC_CTRL.E\N\A\B\L\E\: U1.15 U8.35
DAC_CTRL.LDAC: U1.16 U8.36
DAC_CTRL.R\S\T\: U1.13 U8.33
DAC_CTRL.RSTSEL: U1.14 U8.34
DACA: C13.1 U1.1 U2.12
DACB: C8.1 U1.2 U2.10
DACC: C2.1 U1.7 U2.3
DACD: C4.1 U1.8 U2.5
FAN_CTRL: Q3.G1 RA5.4 U8.15
FAN_GND: D3.1 J4.3 Q3.D1
FAN_TACH: J4.2 RA5.2 U8.24
FB1: Q2.S2 R4.1 RA1.3 U3.5
FB2: Q2.S1 R3.1 RA1.2 U3.10
FB3: Q1.S2 R2.1 RA1.4 U3.3
FB4: Q1.S1 R1.2 RA1.1 U3.12
GND: C6.1 C9.1 C10.1 C11.1 C19.1 C23.1 C24.2 C25.1 C26.1 C27.1 C28.2 C29.2 C30.2 C31.2 C52.2 C53.1 C55.2 C56.2 C57.2 C58.1 C59.1 J1.1 J6.5 J6.SHLD J10.1 Q7.S2 R21.2 R36.1 R37.2 R39.2 R40.2 R41.2 R42.1 R43.1 SW1.2 U1.6 U5.27 U7.1 U8.18 U8.31 U8.47 U8.63 X1.2 X1.4
I\F\A\U\L\T\: RA8.1 U8.9 U9.11
IOUT: C49.2 U5.8 U9.7
LED_B0: RA7.5 U8.39
LED_B1: LED1.3 U8.4
LED_B2: LED2.3 U8.59
LED_B3: LED3.3 U8.56
LED_B4: LED4.3 U8.51
LED_G0: RA7.6 U8.38
LED_G1: LED1.4 U8.10
LED_G2: LED2.4 U8.2
LED_G3: LED3.4 U8.57
LED_G4: LED4.4 U8.52
LED_R0: RA7.7 U8.37
LED_R1: LED1.2 U8.3
LED_R2: LED2.2 U8.58
LED_R3: LED3.2 U8.53
LED_R4: LED4.2 U8.50
MISC.PWM_CTRL: Q3.G2 RA5.3 U8.14
MISC.TLI_OCD: RA5.1 U7.6 U8.25
NetC1_1: C1.1 RA2.1 U2.1
NetC1_2: C1.2 C2.2 RA1.8 RA3.8 U2.2
NetC3_1: C3.1 RA2.2 U2.7
NetC3_2: C3.2 C4.2 RA1.5 RA3.6 U2.6
NetC7_1: C7.1 RA2.3 U2.8
NetC7_2: C7.2 C8.2 RA1.7 RA3.5 U2.9
NetC12_1: C12.1 RA2.4 U2.14
NetC12_2: C12.2 C13.2 RA1.6 RA3.7 U2.13
NetC26_2: C26.2 R38.1 X1.3
NetC33_1: C33.1 D5.A U9.16
NetC43_1: C43.1 R23.2 U9.20
NetC45_1: C45.1 D5.C U9.17
NetC51_1: C51.1 U11.7
NetD1_C: D1.C J1.2
NetF1_2: F1.2 J2.1
NetF2_2: F2.2 J3.2
NetF3_2: F3.2 J2.2
NetF4_2: F4.2 J2.3
NetF5_2: F5.2 J2.4
NetF6_2: F6.2 J2.5
NetF7_2: F7.2 J7.2
NetL3_1: L3.1 U11.6
NetLED1_A: LED1.1 RA6.1
NetLED2_A: LED2.1 RA6.2
NetLED3_A: LED3.1 RA6.3
NetLED4_A: LED4.1 RA6.4
NetLED5_B: LED5.3 RA7.4
NetLED5_G: LED5.4 RA7.3
NetLED5_R: LED5.2 RA7.2
NetQ1_G1: Q1.G1 RA2.8
NetQ1_G2: Q1.G2 RA2.7
NetQ2_G1: Q2.G1 RA2.6
NetQ2_G2: Q2.G2 RA2.5
NetQ5_G1: Q5.Tg U9.18
NetQ5_G2: Q5.Bg U9.15
NetQ6_G1: Q6.G1 Q7.D1 RA9.5
NetQ6_G2: Q6.G2 Q7.D2 RA9.6
NetR5_1: R5.1 R6.2 U6.2
NetR7_1: R7.1 R8.2 U6.3
NetR9_1: R9.1 R10.2 U6.6
NetR11_1: R11.1 R12.2 U6.5
NetR13_1: R13.1 R14.2 U6.9
NetR15_1: R15.1 R16.2 U6.10
NetR17_1: R17.1 R18.2 U6.13
NetR19_1: R19.1 R20.2 U6.12
NetR21_1: R21.1 U8.60
NetR25_1: R25.1 R26.2 U9.6
NetR27_1: R27.1 U9.13
NetR30_2: R30.2 R31.2 R32.2 U9.4
NetR33_1: R33.1 U11.10
NetRA4_6: RA4.6 RT2.1 U5.11
NetRA4_8: RA4.8 RT1.2 U5.10
NetRA9_7: RA9.7 U9.10
NetU5_2: U5.2 U5.3
NRST: C24.1 J10.8 SW1.1 U8.7
OSC_IN: C25.2 U8.5 X1.1
OSC_OUT: R38.2 U8.6
PG_3v3: U8.11 U11.9
PGND: C33.2 C34.1 C35.1 C36.1 C37.1 C38.1 C39.1 C40.1 C42.2 C43.2 C44.- C47.1 C48.1 C49.1 C50.1 C52.1 C54.2 C55.1 C56.1 C57.1 D4.A J7.1 J8.1 Q3.S1 Q3.S2 Q5.Pgnd Q7.S1 R26.1 R32.1 R33.2 R35.1 R36.2 R39.1 R40.1 R41.1 RA5.5 RA5.6 U7.7 U9.14 U9.21 U10.2 U10.3 U11.4 U11.5 U11.11
  other v1: 41.65,14.75 42.75,14.75 41.65,15.85 42.75,15.85
PHASE: C45.2 L1.1 Q5.Tgr Q5.Vsw U9.19
PP_STAT: Q4.G2 R28.1 U10.6
PROG.SWCLK: J10.5 U8.49
PROG.SWDIO: J10.6 U8.46
PROG.SWO: J10.7 U8.55
PROG.TGT_RX: J10.4 U8.17
PROG.TGT_TX: J10.3 U8.16
PWM_GND: D3.2 J5.2 Q3.D2
PWR_CNTRL.SCL: RA8.4 U8.61 U9.9
PWR_CNTRL.SDA: RA8.3 U8.62 U9.8
PWR_CNTRL.Vcc_ON: Q7.G2 U8.30
PWR_CNTRL.Vsys_ON: Q7.G1 U8.29
reg_EN: R34.1 R35.2 U11.2
SRN: C37.2 C38.2 C39.2 C46.2 C47.2 C48.2 D2.C F2.1 Q4.D1 R24.2 R29.2 U10.1
SRP: C46.1 L1.2 R24.1 R27.2
Tbat: J9.1 RA4.7 U5.12
Tfet: RA4.5 RT3.2 U5.9
Vad: C40.2 C41.1 D4.C F7.1 R22.1 R23.1 R25.2 U9.2
Vcc: C6.2 C19.2 C23.2 D1.A L2.1 LED5.1 Q6.D2 RA5.7 RA5.8 RA6.5 RA6.6 RA6.7 RA6.8 RA8.5 RA8.6 RA8.7 RA8.8 RA9.1 RA9.2 U1.12 U5.28 U7.2
VCell1: R18.1 U5.16 U6.14
VCell2: R14.1 U5.15 U6.8
VCell3: R10.1 U5.14 U6.7
VCell4: R6.1 U5.13 U6.1
Vmcu: C27.2 C28.1 C29.1 C30.1 C31.1 C51.2 C54.1 J10.2 L3.2 Q6.S2 RA9.3 U8.19 U8.32 U8.48 U8.64 U11.1 U11.8
Vref: C5.2 C15.2 C18.2 RA4.1 RA4.2 RA4.3 RA4.4 U1.3 U4.1 U5.31
Vregin: C44.+ C50.2 Q4.S1 Q4.S2 Q6.S1 R28.2 R34.2 RA9.4 U10.4 U11.3
Vsns: R29.1 R31.1 U9.12
Vsys: C14.1 C16.1 C17.1 C22.1 D3.3 J4.1 J5.1 J8.2 Q6.D1 U2.4 U3.4 U4.3 U6.4
pads on no net: J1.drill J6.1 J10.drill RA7.1 RA7.8 U5.5 U5.6 U5.7 U5.29 U8.1 U8.27 U8.54

## Silkscreen, mask and mechanical layers (free items; w line width, h text height)
Mechanical 13:
  circle w0.2: c2.5,47.5 r3
  circle w0.2: c47.5,47.5 r3
  circle w0.2: c47.5,2.5 r3
  circle w0.2: c2.5,2.5 r3
  lines w0.1: 0,24.5 50,24.5 ; 25.8,24.5 25.8,26.5 27,27.7 27,44 27.5,44 39,44 39,50